# EAGLE board QFN28 v1.0 (EAGLE 7.2.0)
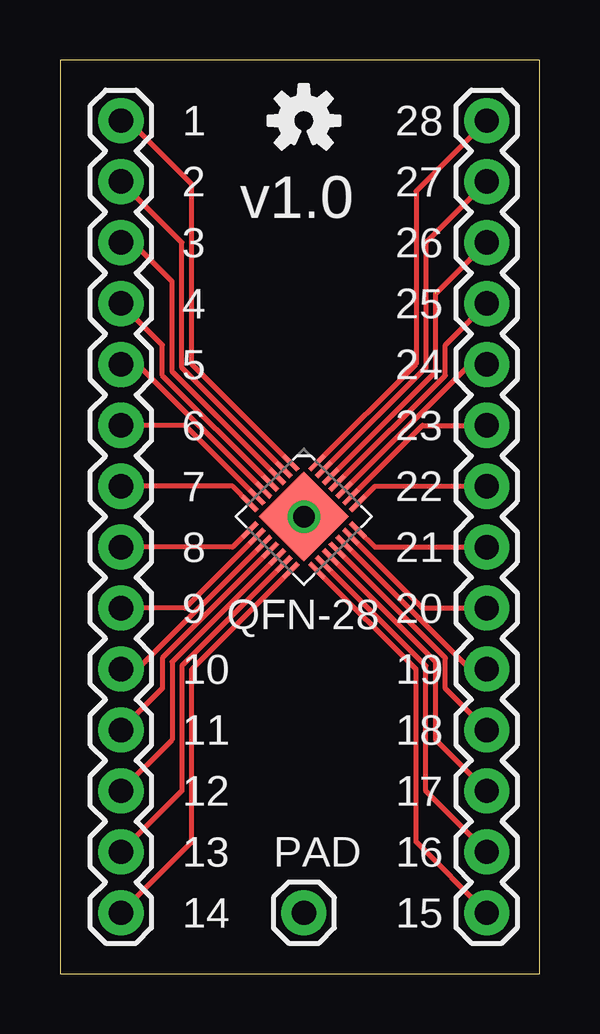
[diagram p0: board, top side]
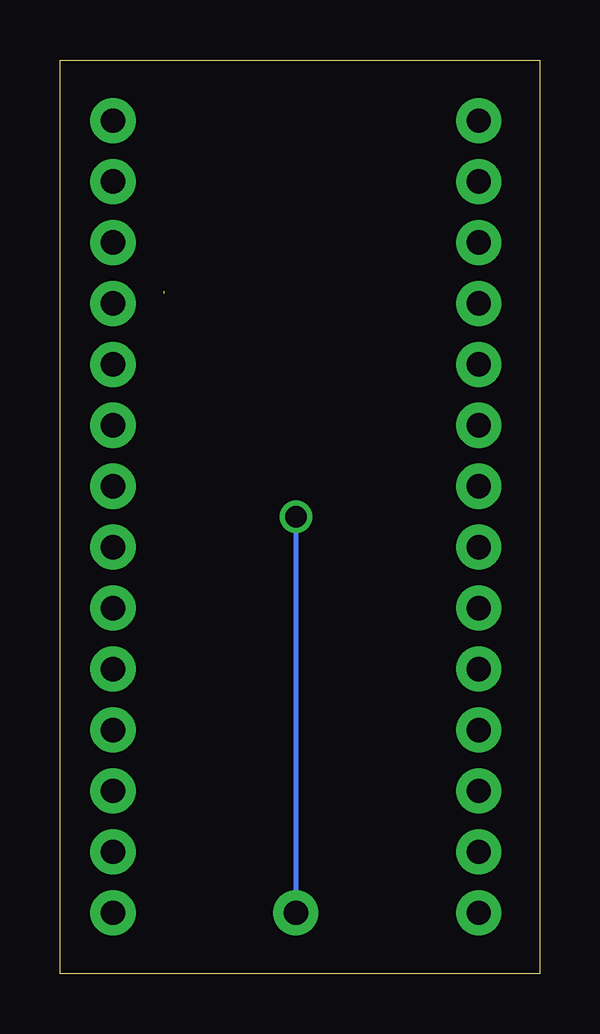
[diagram p1: board, bottom side, seen from below]

Size 19.99 x 38.09 mm. Coordinates in mm from the lower left corner, seen from the top.
Outline: 0,0 19.99,0 19.99,38.09 0,38.09 0,0
Copper layers (1*16): Top 0.0356mm / dielectric 1.5011mm / Bottom 0.0356mm
Design rules "OSH Park": minimum track width 6mil, minimum drill 13mil, track to track 6mil, track to pad 6mil, pad to pad 6mil, via to via 6mil, smd to smd 6mil, copper to edge 15mil, drill to drill 6mil, minimum pad ring 7mil, minimum via ring 7mil, stop-mask expansion 3mil, vias tented up to drill 0mil, thermal gap 10mil

## Footprints (pad centres in the part's own frame; a part is rotated, then mirrored left to right if it is on the bottom)
1X14 = drill 1.016 pad 1.88: 1 0,0; 2 2.54,0; 3 5.08,0; 4 7.62,0; 5 10.16,0; 6 12.7,0; 7 15.24,0; 8 17.78,0; 9 20.32,0; 10 22.86,0; 11 25.4,0; 12 27.94,0; 13 30.48,0; 14 33.02,0
1X01 = drill 1.016 pad 1.88: 1 0,0
QFN-28 = smd 0.85 x 0.2: 1 -1.975,1.2; 2 -1.975,0.8; 3 -1.975,0.4; 4 -1.975,0; 5 -1.975,-0.4; 6 -1.975,-0.8; 7 -1.975,-1.2; 15 1.975,-1.2; 16 1.975,-0.8; 17 1.975,-0.4; 18 1.975,0; 19 1.975,0.4; 20 1.975,0.8; 21 1.975,1.2 | smd 0.2 x 0.85: 8 -1.2,-1.975; 9 -0.8,-1.975; 10 -0.4,-1.975; 11 0,-1.975; 12 0.4,-1.975; 13 0.8,-1.975; 14 1.2,-1.975; 22 1.2,1.975; 23 0.8,1.975; 24 0.4,1.975; 25 0,1.975; 26 -0.4,1.975; 27 -0.8,1.975; 28 -1.2,1.975 | smd 2.65 x 2.65: 29 0,0

## Placement (x,y rotation side)
FRAME1  FRAME-LETTER  [CREATIVE_COMMONS]  -7.62,-7.62 0 top  (outside the outline)
JP1  M14  [1X14]  2.54,2.54 90 top
JP2  M14  [1X14]  17.78,2.54 90 top
PAD  M01PTH  [1X01]  10.16,2.54 0 top
U$1  QFN-28  [QFN-28]  10.16,19.05 315 top
U$2  [OSHW-LOGO-S]  10.16,35.56 0 top

## Library data of the parts
FRAME1 U$2 = SparkFun-Aesthetics
JP1 JP2 PAD = SparkFun-Connectors
U$1 = Kevin-GenericICFootprints

## Nets
GND: PAD.1 U$1.29
N$1: JP1.14 U$1.1
N$2: JP1.13 U$1.2
N$3: JP1.12 U$1.3
N$4: JP1.11 U$1.4
N$5: JP1.10 U$1.5
N$6: JP1.9 U$1.6
N$7: JP1.8 U$1.7
N$8: JP1.7 U$1.8
N$9: JP1.6 U$1.9
N$10: JP1.5 U$1.10
N$11: JP1.4 U$1.11
N$12: JP1.3 U$1.12
N$13: JP1.2 U$1.13
N$14: JP1.1 U$1.14
N$15: JP2.1 U$1.15
N$16: JP2.2 U$1.16
N$17: JP2.3 U$1.17
N$18: JP2.4 U$1.18
N$19: JP2.5 U$1.19
N$20: JP2.6 U$1.20
N$21: JP2.7 U$1.21
N$22: JP2.8 U$1.22
N$23: JP2.9 U$1.23
N$24: JP2.10 U$1.24
N$25: JP2.11 U$1.25
N$26: JP2.12 U$1.26
N$27: JP2.13 U$1.27
N$28: JP2.14 U$1.28

## Tracks (layer width: path | path; a pad name or v marks a point on that pad's centre or on a via)
GND  (via drill 0.9)
  Bottom 0.203: U$1.29 PAD.1
  other vias: 10.16,19.05
N$1
  Top 0.203: U$1.1 5.49,25.42 5.49,32.92 2.85,35.56 JP1.14
N$2
  Top 0.203: U$1.2 5.08,25.26 5.08,30.48 JP1.13
N$3
  Top 0.203: U$1.3 4.67,25.1 4.67,28.85 3.05,30.48 JP1.12
N$4
  Top 0.203: U$1.4 4.27,24.94 4.27,26.21 JP1.11
N$5
  Top 0.203: U$1.5 3.24,25.4 JP1.10
N$6
  Top 0.203: U$1.6 5.22,22.86 JP1.9
N$7
  Top 0.203: U$1.7 7.19,20.32 JP1.8
N$8
  Top 0.203: U$1.8 7.19,17.78 JP1.7
N$9
  Top 0.203: U$1.9 5.22,15.24 JP1.6
N$10
  Top 0.203: U$1.10 3.24,12.7 JP1.5
N$11
  Top 0.203: U$1.11 4.27,13.16 4.27,11.89 JP1.4
N$12
  Top 0.203: U$1.12 4.67,13 4.67,9.75 JP1.3
N$13
  Top 0.203: U$1.13 5.08,12.84 5.08,7.62 JP1.2
N$14
  Top 0.203: U$1.14 5.49,12.68 5.49,5.49 JP1.1
N$15
  Top 0.203: U$1.15 14.83,12.68 14.83,5.49 JP2.1
N$16
  Top 0.203: U$1.16 15.24,12.84 15.24,7.62 JP2.2
N$17
  Top 0.203: U$1.17 15.65,13 15.65,9.75 JP2.3
N$18
  Top 0.203: U$1.18 16.05,13.16 16.05,11.89 JP2.4
N$19
  Top 0.203: U$1.19 17.08,12.7 JP2.5
N$20
  Top 0.203: U$1.20 15.1,15.24 JP2.6
N$21
  Top 0.203: U$1.21 13.13,17.78 JP2.7
N$22
  Top 0.203: U$1.22 13.13,20.32 JP2.8
N$23
  Top 0.203: U$1.23 15.1,22.86 JP2.9
N$24
  Top 0.203: U$1.24 17.08,25.4 JP2.10
N$25
  Top 0.203: U$1.25 16.05,24.94 16.05,26.21 JP2.11
N$26  (1 unrouted)
  Top 0.203: U$1.26 15.65,25.1 15.65,28.35 JP2.12
N$27
  Top 0.203: U$1.27 15.24,25.26 15.24,30.48 JP2.13
N$28
  Top 0.203: U$1.28 14.83,25.42 14.83,32.61 JP2.14

## Text on the board
tPlace: 1 | 28 | 2 | 27 | v1.0 | 3 | 26 | 4 | 25 | 5 | 24 | 6 | 23 | 7 | 22 | 8 | 21 | 9 | 20 | 10 | 19 | 11 | 18 | 12 | 17 | 13 | PAD | 16 | 14 | 15
tDocu: Kevin Neubauer